# EAGLE board Zylox V2_0 (EAGLE 7.3.0), part 1 of 2
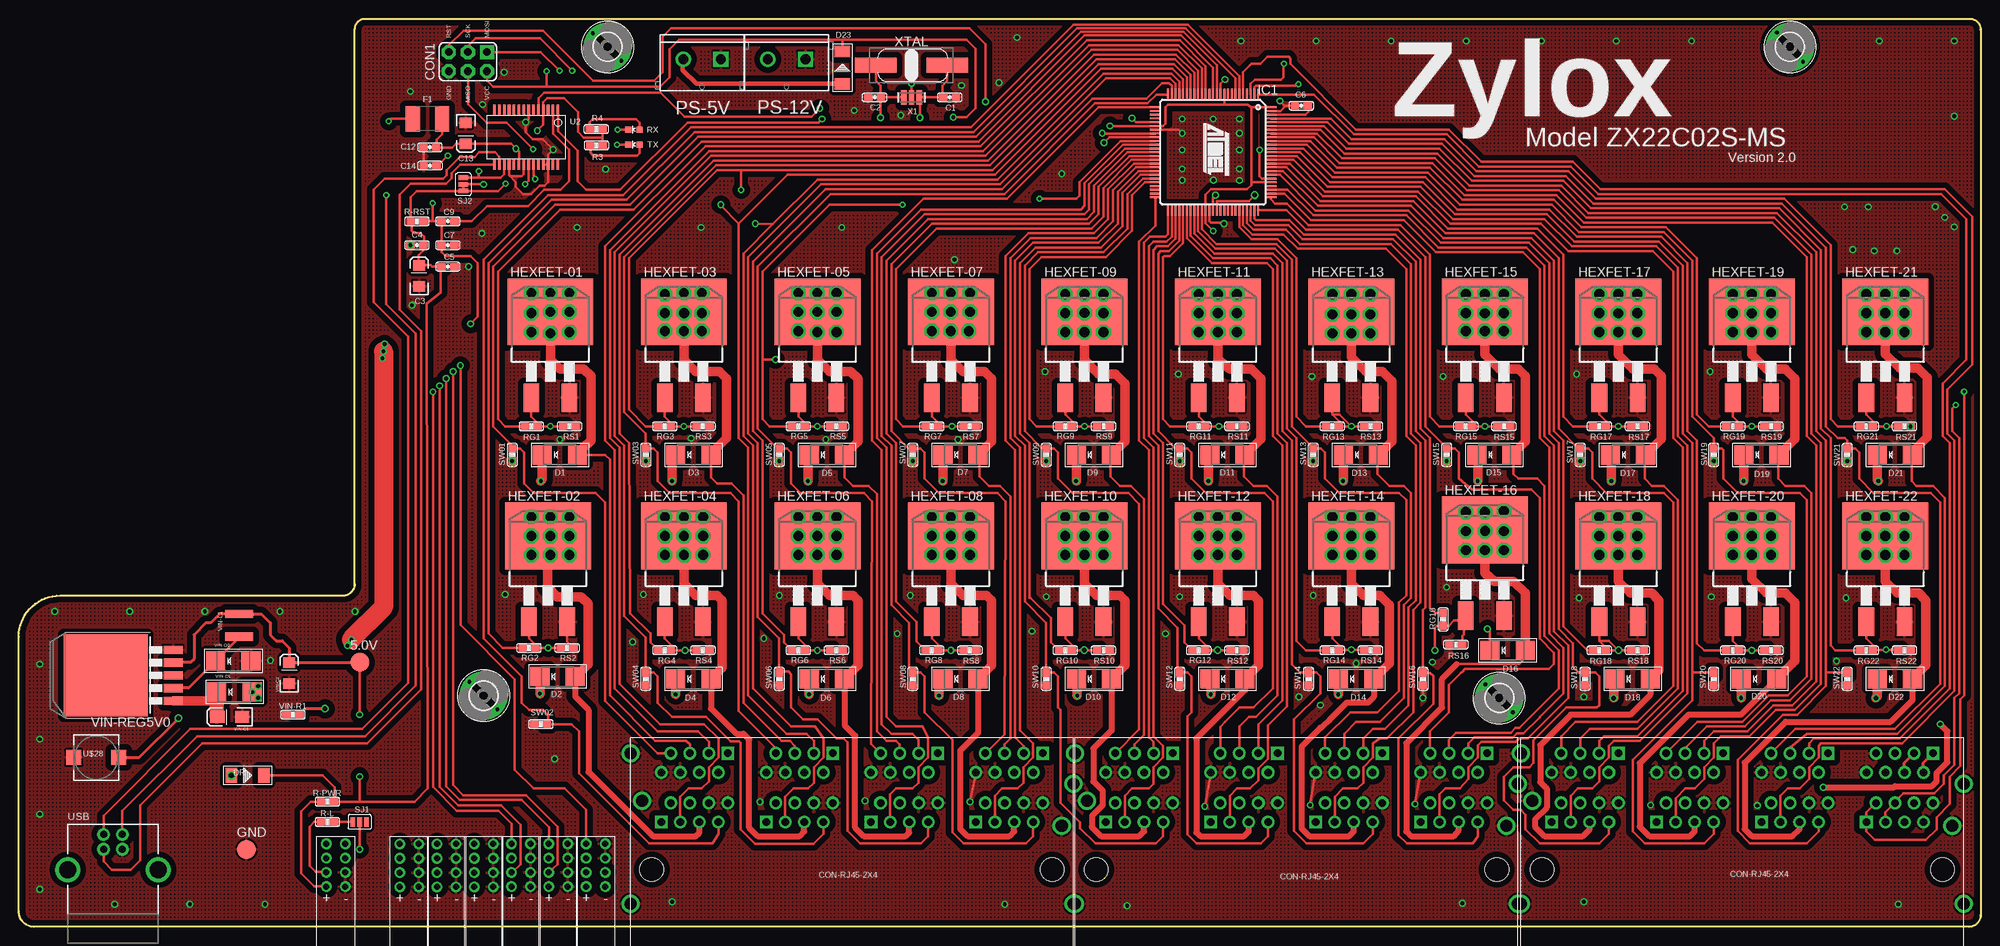
[diagram p0: board, top side]
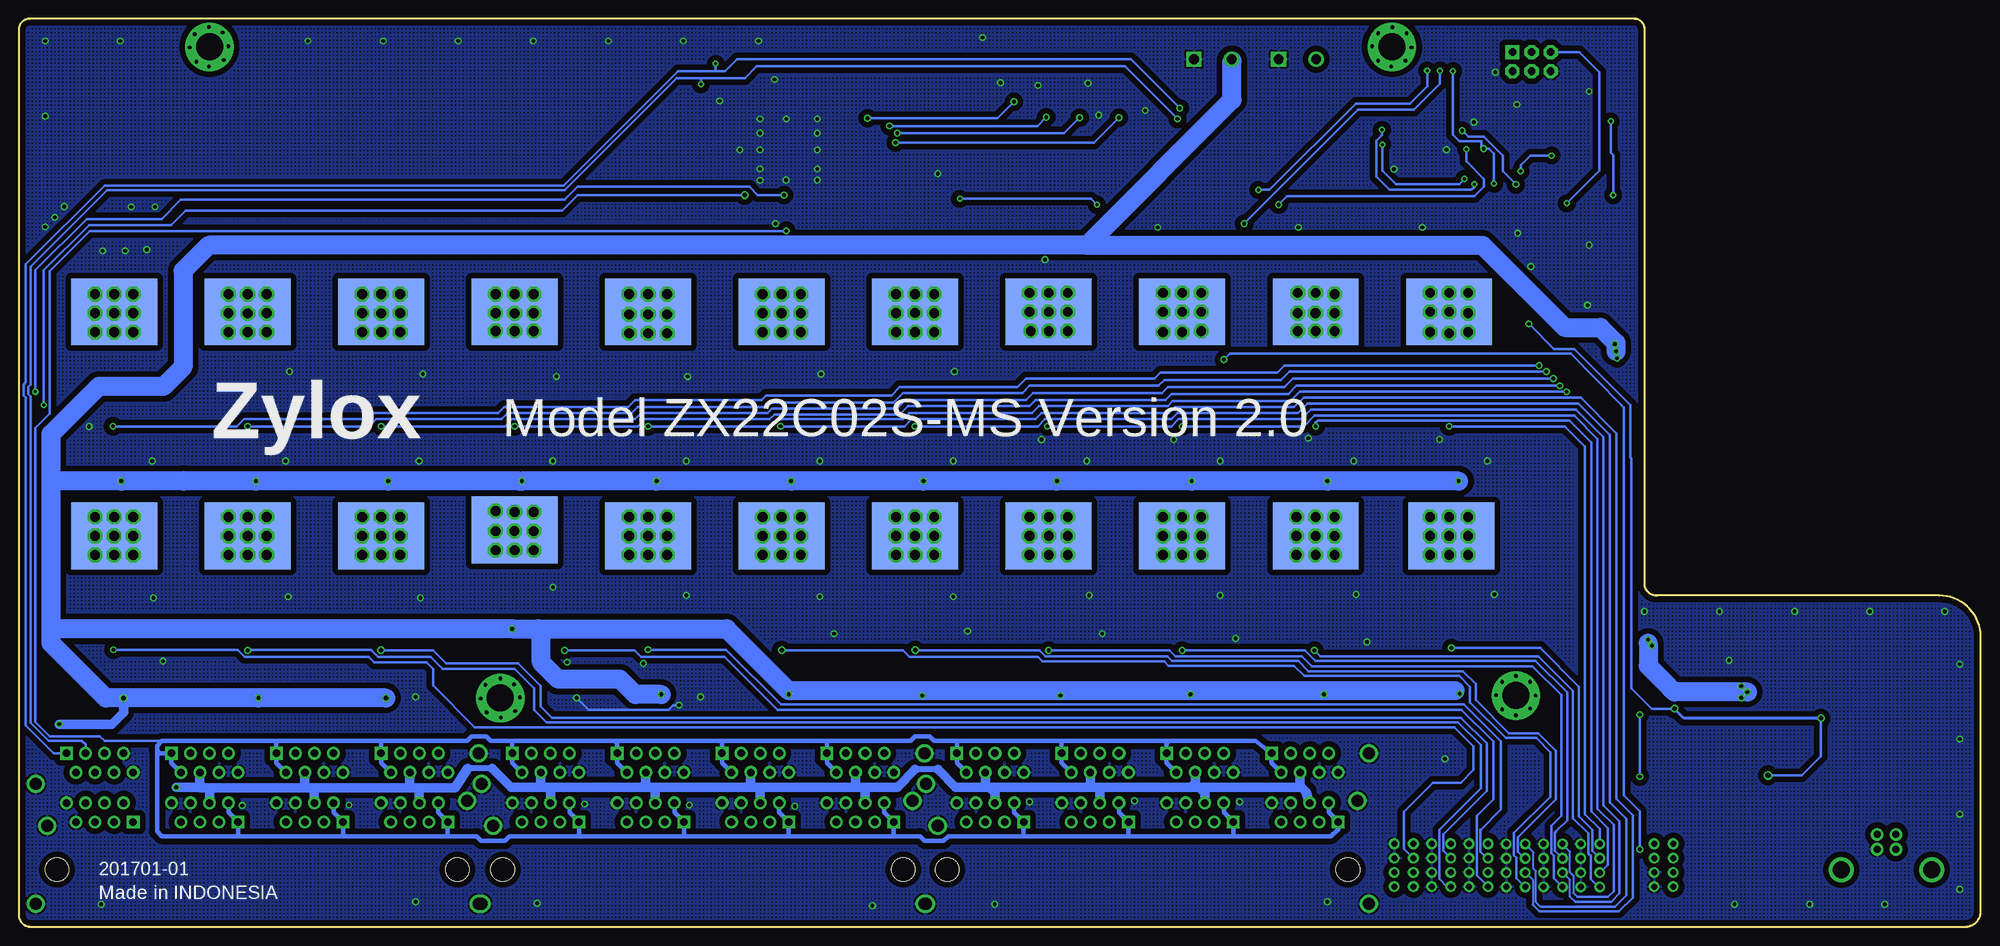
[diagram p1: board, bottom side, seen from below]

Size 261.3 x 120.97 mm. Coordinates in mm from the lower left corner, seen from the top.
Outline: 44.77,45.7 44.77,119.62 arc-90 46.11,120.97 259.84,120.97 arc-90 261.3,119.5 261.3,1.57 arc-90 259.73,0 2.03,0 arc-90 0,2.03 0,38.62 arc-90 5.51,44.13 43.2,44.13 arc90 44.77,45.7
Copper layers (1*16): Top 0.035mm / dielectric 1.5mm / Bottom 0.035mm
Design rules "DFRobot_Eagle_Rule_v0.4": minimum track width 6mil, minimum drill 12mil, track to track 6mil, track to pad 6mil, pad to pad 6mil, via to via 6mil, smd to smd 0mil, copper to edge 10mil, drill to drill 10mil, minimum pad ring 12mil, minimum via ring 8mil, stop-mask expansion 2mil, vias tented up to drill 25mil, thermal gap 10mil
Net classes: 1 power: width 0.254 mm; 3 usbvcc: width 0.508 mm, drill 0.61 mm, clearance 0.254 mm

## Footprints (pad centres in the part's own frame; a part is rotated, then mirrored left to right if it is on the bottom)
B2,54 = smd 2.54 x 2.54: TP 0,0
C0603 = smd 1.1 x 1: 1 -0.85,0; 2 0.85,0
EIA3126 = smd 1.4 x 1.6: A 1.4,0; C -1.4,0
CON-ICSP = drill 1.016 pad 1.88 square: 1 -2.54,-1.27 | drill 1.016 pad 1.88 octagon: 2 -2.54,1.27; 3 0,-1.27; 4 0,1.27; 5 2.54,-1.27; 6 2.54,1.27
SMADIODE = smd 2.54 x 2.54: A 2.349,0; C -2.349,0
D2010 = smd 1.524 x 2.032: + -2.159,0; - 2.159,0
L1812 = smd 1.9 x 3.4: 1 -1.95,0; 2 1.95,0
HOLES-3M6-PAD = drill 3.6 pad 6.452: B3,6 0,0
D2PAK = smd 2.083 x 3.81: 1 -2.54,-8.89; 3 2.54,-8.89 | smd 11.43 x 8.89: 2 0,2.54 | smd 11.43 x 8.89 bottom: 4 0,2.54
TQFP100 = smd 1.473 x 0.254: 1 -7.696,6; 2 -7.696,5.5; 3 -7.696,5; 4 -7.696,4.5; 5 -7.696,4; 6 -7.696,3.5; 7 -7.696,3; 8 -7.696,2.5; 9 -7.696,2; 10 -7.696,1.5; 11 -7.696,1; 12 -7.696,0.5; 13 -7.696,0; 14 -7.696,-0.5; 15 -7.696,-1; 16 -7.696,-1.5; 17 -7.696,-2; 18 -7.696,-2.5; 19 -7.696,-3; 20 -7.696,-3.5; 21 -7.696,-4; 22 -7.696,-4.5; 23 -7.696,-5; 24 -7.696,-5.5; 25 -7.696,-6; 51 7.696,-6; 52 7.696,-5.5; 53 7.696,-5; 54 7.696,-4.5; 55 7.696,-4; 56 7.696,-3.5; 57 7.696,-3; 58 7.696,-2.5; 59 7.696,-2; 60 7.696,-1.5; 61 7.696,-1; 62 7.696,-0.5; 63 7.696,0; 64 7.696,0.5; 65 7.696,1; 66 7.696,1.5; 67 7.696,2; 68 7.696,2.5; 69 7.696,3; 70 7.696,3.5; 71 7.696,4; 72 7.696,4.5; 73 7.696,5; 74 7.696,5.5; 75 7.696,6 | smd 0.254 x 1.473: 26 -6,-7.696; 27 -5.5,-7.696; 28 -5,-7.696; 29 -4.5,-7.696; 30 -4,-7.696; 31 -3.5,-7.696; 32 -3,-7.696; 33 -2.5,-7.696; 34 -2,-7.696; 35 -1.5,-7.696; 36 -1,-7.696; 37 -0.5,-7.696; 38 0,-7.696; 39 0.5,-7.696; 40 1,-7.696; 41 1.5,-7.696; 42 2,-7.696; 43 2.5,-7.696; 44 3,-7.696; 45 3.5,-7.696; 46 4,-7.696; 47 4.5,-7.696; 48 5,-7.696; 49 5.5,-7.696; 50 6,-7.696; 76 6,7.696; 77 5.5,7.696; 78 5,7.696; 79 4.5,7.696; 80 4,7.696; 81 3.5,7.696; 82 3,7.696; 83 2.5,7.696; 84 2,7.696; 85 1.5,7.696; 86 1,7.696; 87 0.5,7.696; 88 0,7.696; 89 -0.5,7.696; 90 -1,7.696; 91 -1.5,7.696; 92 -2,7.696; 93 -2.5,7.696; 94 -3,7.696; 95 -3.5,7.696; 96 -4,7.696; 97 -4.5,7.696; 98 -5,7.696; 99 -5.5,7.696; 100 -6,7.696
LED3MM-1X4 = drill 0.8 pad 1.15: A1 -1.27,4.065; A2 -1.27,2.16; A3 -1.27,0.255; A4 -1.27,-1.65; C1 1.27,4.065; C2 1.27,2.16; C3 1.27,0.255; C4 1.27,-1.65
SCREWTERMINAL-5MM-2 = drill 1.3 pad 2.032 square: 1 0,0 | drill 1.3 pad 2.032: 2 5,0
R0603 = smd 1.1 x 1: 1 -0.85,0; 2 0.85,0
RJ45-2X4 = drill 1 pad 1.676 square: A1 -16.51,0; B1 -7.62,9.14; C1 -2.54,0; D1 6.35,9.14; E1 11.43,0; F1 20.32,9.14; G1 25.4,0; H1 34.29,9.14 | drill 1 pad 1.676: A2 -15.24,2.54; A3 -13.97,0; A4 -12.7,2.54; A5 -11.43,0; A6 -10.16,2.54; A7 -8.89,0; A8 -7.62,2.54; B2 -8.89,6.6; B3 -10.16,9.14; B4 -11.43,6.6; B5 -12.7,9.14; B6 -13.97,6.6; B7 -15.24,9.14; B8 -16.51,6.6; C2 -1.27,2.54; C3 0,0; C4 1.27,2.54; C5 2.54,0; C6 3.81,2.54; C7 5.08,0; C8 6.35,2.54; D2 5.08,6.6; D3 3.81,9.14; D4 2.54,6.6; D5 1.27,9.14; D6 0,6.6; D7 -1.27,9.14; D8 -2.54,6.6; E2 12.7,2.54; E3 13.97,0; E4 15.24,2.54; E5 16.51,0; E6 17.78,2.54; E7 19.05,0; E8 20.32,2.54; F2 19.05,6.6; F3 17.78,9.14; F4 16.51,6.6; F5 15.24,9.14; F6 13.97,6.6; F7 12.7,9.14; F8 11.43,6.6; G2 26.67,2.54; G3 27.94,0; G4 29.21,2.54; G5 30.48,0; G6 31.75,2.54; G7 33.02,0; G8 34.29,2.54; H2 33.02,6.6; H3 31.75,9.14; H4 30.48,6.6; H5 29.21,9.14; H6 27.94,6.6; H7 26.67,9.14; H8 25.4,6.6 | drill 1.6: GND1 -20.605,9.14; GND2 -19.05,2.8; GND3 -20.605,-10.92; GND4 38.385,5.08; GND5 36.83,-0.5; GND6 38.385,-10.92 | hole 3.2: -17.78,-6.35; 35.56,-6.35
LED-0603 = smd 0.8 x 0.8: A 0,-0.75; C 0,0.75
SJ_3 = smd 0.635 x 1.27: 1 -0.889,0; 2 0,0; 3 0.889,0
SSOP28DB = smd 0.348 x 1.397: 1 -4.225,-3.656; 2 -3.575,-3.656; 3 -2.925,-3.656; 4 -2.275,-3.656; 5 -1.625,-3.656; 6 -0.975,-3.656; 7 -0.325,-3.656; 8 0.325,-3.656; 9 0.975,-3.656; 10 1.625,-3.656; 11 2.275,-3.656; 12 2.925,-3.656; 13 3.575,-3.656; 14 4.225,-3.656; 15 4.225,3.656; 16 3.575,3.656; 17 2.925,3.656; 18 2.275,3.656; 19 1.625,3.656; 20 0.975,3.656; 21 0.325,3.656; 22 -0.325,3.656; 23 -0.975,3.656; 24 -1.625,3.656; 25 -2.275,3.656; 26 -2.925,3.656; 27 -3.575,3.656; 28 -4.225,3.656
PUSHBUTTON-SMD-SJ = smd 2 x 2: P$1 3,0; P$2 -3,0
USB-B-PTH = drill 0.914 pad 1.676: D+ 3.81,1.25; D- 5.791,1.25; GND 3.81,-1.25; VBUS 5.791,-1.25 | drill 2.286: S1 1.092,-6.02; S2 1.092,6.02
EIA3216-KIT = smd 1.9 x 1.6: A 1.65,0; C -1.65,0
RWPA4018 = smd 1.1 x 3.7: 1 -1.5,0; 2 1.5,0
TO-293-5 = smd 10.922 x 11.176: 6 0,3.048 | smd 1.092 x 2.54: FB 1.702,-5.944; GND 0,-5.944; ONOFF 3.404,-5.944; OUT -1.702,-5.944; VIN -3.404,-5.944
CSTCE* = smd 0.7 x 1.905: 1 -1.041,0; 2 0,0; 3 1.041,0
SMD-CRYSTAL = smd 5.5 x 2: 1 -4.75,0; 2 4.75,0

## Placement (x,y rotation side)
5.0V  PTR1B2,54  [B2,54]  45.4,35.24 0 top
C1  22p  [C0603]  123.98,110.49 180 top
C2  22p  [C0603]  113.98,110.49 0 top
C3  10uF  [EIA3126]  53.29,86.74 90 top
C4  100n  [C0603]  53.02,90.81 0 top
C5  100n  [C0603]  57.15,87.95 180 top
C6  100n  [C0603]  170.81,109.38 180 top
C7  100n  [C0603]  57.15,90.81 180 top
C9  100n  [C0603]  57.15,93.98 0 top
C12  0.1uF  [C0603]  54.75,103.85 180 top
C13  10uF  [EIA3126]  59.55,105.72 270 top
C14  0.1uF  [C0603]  54.77,101.4 180 top
CON1  CON-ICSP  [CON-ICSP]  59.82,115.25 180 top
D1  [SMADIODE]  72.07,62.87 0 top
D2  [SMADIODE]  71.75,33.34 0 top
D3  [SMADIODE]  89.85,62.87 0 top
D4  [SMADIODE]  89.85,33.02 0 top
D5  [SMADIODE]  107.63,62.87 0 top
D6  [SMADIODE]  107.63,33.02 0 top
D7  [SMADIODE]  125.41,62.87 0 top
D8  [SMADIODE]  125.41,33.02 0 top
D9  [SMADIODE]  143.19,62.87 0 top
D10  [SMADIODE]  143.19,33.02 0 top
D11  [SMADIODE]  160.97,62.87 0 top
D12  [SMADIODE]  160.97,33.02 0 top
D13  [SMADIODE]  178.75,62.87 0 top
D14  [SMADIODE]  178.12,33.02 0 top
D15  [SMADIODE]  196.53,62.87 0 top
D16  [SMADIODE]  198.28,36.83 0 top
D17  [SMADIODE]  214.31,62.87 0 top
D18  [SMADIODE]  214.95,33.02 0 top
D19  [SMADIODE]  232.09,62.87 0 top
D20  [SMADIODE]  231.78,33.02 0 top
D21  [SMADIODE]  249.87,62.87 0 top
D22  [SMADIODE]  249.87,33.02 0 top
D23  M7  [D2010]  109.7,114.46 90 top
DR  M7  [D2010]  30.48,20.16 0 top
F1  MF-MSMF050-2 500mA  [L1812]  54.45,107.63 180 top
GND  PTR1B2,54  [B2,54]  30.32,10.32 0 top
H1  HOLES-PAD-3M6-PAD  [HOLES-3M6-PAD]  78.42,117.22 0 top
H2  HOLES-PAD-3M6-PAD  [HOLES-3M6-PAD]  61.91,30.8 0 top
H3  HOLES-PAD-3M6-PAD  [HOLES-3M6-PAD]  197.17,30.48 0 top
H4  HOLES-PAD-3M6-PAD  [HOLES-3M6-PAD]  235.9,117.22 0 top
HEXFET-01  IRLZ44NS  [D2PAK]  70.8,79.38 0 top
HEXFET-02  IRLZ44NS  [D2PAK]  70.48,49.53 0 top
HEXFET-03  IRLZ44NS  [D2PAK]  88.58,79.38 0 top
HEXFET-04  IRLZ44NS  [D2PAK]  88.58,49.53 0 top
HEXFET-05  IRLZ44NS  [D2PAK]  106.36,79.38 0 top
HEXFET-06  IRLZ44NS  [D2PAK]  106.36,49.53 0 top
HEXFET-07  IRLZ44NS  [D2PAK]  124.14,79.38 0 top
HEXFET-08  IRLZ44NS  [D2PAK]  124.14,49.53 0 top
HEXFET-09  IRLZ44NS  [D2PAK]  141.92,79.38 0 top
HEXFET-10  IRLZ44NS  [D2PAK]  141.92,49.53 0 top
HEXFET-11  IRLZ44NS  [D2PAK]  159.7,79.38 0 top
HEXFET-12  IRLZ44NS  [D2PAK]  159.7,49.53 0 top
HEXFET-13  IRLZ44NS  [D2PAK]  177.48,79.38 0 top
HEXFET-14  IRLZ44NS  [D2PAK]  177.48,49.53 0 top
HEXFET-15  IRLZ44NS  [D2PAK]  195.26,79.38 0 top
HEXFET-16  IRLZ44NS  [D2PAK]  195.26,50.32 0 top
HEXFET-17  IRLZ44NS  [D2PAK]  213.04,79.38 0 top
HEXFET-18  IRLZ44NS  [D2PAK]  213.04,49.53 0 top
HEXFET-19  IRLZ44NS  [D2PAK]  230.82,79.38 0 top
HEXFET-20  IRLZ44NS  [D2PAK]  230.82,49.53 0 top
HEXFET-21  IRLZ44NS  [D2PAK]  248.6,79.38 0 top
HEXFET-22  IRLZ44NS  [D2PAK]  248.6,49.53 0 top
IC1  ATMEGA2560-16AU  [TQFP100]  159.07,103.19 270 top
LD1  LED-1X4  [LED3MM-1X4]  52.01,6.97 0 top
LD2  LED-1X4  [LED3MM-1X4]  56.97,6.97 0 top
LD3  LED-1X4  [LED3MM-1X4]  61.93,6.97 0 top
LD4  LED-1X4  [LED3MM-1X4]  66.89,6.99 0 top
LD5  LED-1X4  [LED3MM-1X4]  71.85,6.99 0 top
LD6  LED-1X4  [LED3MM-1X4]  76.84,6.99 0 top
PS-5V  M025MM  [SCREWTERMINAL-5MM-2]  93.5,115.57 180 top
PS-12V  M025MM  [SCREWTERMINAL-5MM-2]  104.78,115.57 180 top
PWR  LED-1X4  [LED3MM-1X4]  42.23,6.99 0 top
R3  330  [R0603]  76.95,104.1 0 top
R4  330  [R0603]  76.9,106.26 0 top
R-L  1K  [R0603]  41.12,13.97 0 top
R-PWR  1K  [R0603]  41.12,16.67 0 top
R-RST  10K  [R0603]  53.03,93.98 180 top
RG1  330  [R0603]  68.26,66.67 0 top
RG2  330  [R0603]  67.94,37.15 0 top
RG3  330  [R0603]  86.04,66.67 0 top
RG4  330  [R0603]  86.04,36.83 0 top
RG5  330  [R0603]  103.82,66.67 0 top
RG6  330  [R0603]  103.82,36.83 0 top
RG7  330  [R0603]  121.6,66.67 0 top
RG8  330  [R0603]  121.6,36.83 0 top
RG9  330  [R0603]  139.38,66.67 0 top
RG10  330  [R0603]  139.38,36.83 0 top
RG11  330  [R0603]  157.16,66.67 0 top
RG12  330  [R0603]  157.16,36.83 0 top
RG13  330  [R0603]  174.94,66.67 0 top
RG14  330  [R0603]  174.94,36.83 0 top
RG15  330  [R0603]  192.72,66.67 0 top
RG16  330  [R0603]  189.71,40.96 270 top
RG17  330  [R0603]  210.5,66.67 0 top
RG18  330  [R0603]  210.5,36.83 0 top
RG19  330  [R0603]  228.28,66.67 0 top
RG20  330  [R0603]  228.28,36.83 0 top
RG21  330  [R0603]  246.06,66.67 0 top
RG22  330  [R0603]  246.06,36.83 0 top
RJ1  CON-RJ45-2X4  [RJ45-2X4]  102.08,13.97 0 top
RJ2  CON-RJ45-2X4  [RJ45-2X4]  161.29,13.97 0 top
RJ3  CON-RJ45-2X4  [RJ45-2X4]  220.66,13.97 0 top
RS1  10K  [R0603]  73.34,66.67 180 top
RS2  10K  [R0603]  73.03,37.15 180 top
RS3  10K  [R0603]  91.12,66.67 180 top
RS4  10K  [R0603]  91.12,36.83 180 top
RS5  10K  [R0603]  108.9,66.67 180 top
RS6  10K  [R0603]  108.9,36.83 180 top
RS7  10K  [R0603]  126.68,66.67 180 top
RS8  10K  [R0603]  126.68,36.83 180 top
RS9  10K  [R0603]  144.46,66.67 180 top
RS10  10K  [R0603]  144.46,36.83 180 top
RS11  10K  [R0603]  162.24,66.67 180 top
RS12  10K  [R0603]  162.24,36.83 180 top
RS13  10K  [R0603]  180.02,66.67 180 top
RS14  10K  [R0603]  180.02,36.83 180 top
RS15  10K  [R0603]  197.8,66.67 180 top
RS16  10K  [R0603]  191.4,37.59 0 top
RS17  10K  [R0603]  215.58,66.67 180 top
RS18  10K  [R0603]  215.58,36.83 180 top
RS19  10K  [R0603]  233.36,66.67 180 top
RS20  10K  [R0603]  233.36,36.83 180 top
RS21  10K  [R0603]  251.14,66.67 180 top
RS22  10K  [R0603]  251.14,36.83 180 top
RX  Green  [LED-0603]  81.91,106.18 90 top
SJ1  [SJ_3]  45.4,13.97 180 top
SJ2  [SJ_3]  59.21,98.91 90 top
SW01  1K  [R0603]  65.72,62.87 90 top
SW02  1K  [R0603]  69.53,26.99 180 top
SW03  1K  [R0603]  83.5,62.87 90 top
SW04  1K  [R0603]  83.5,33.02 270 top
SW05  1K  [R0603]  101.28,62.87 90 top
SW06  1K  [R0603]  101.28,33.02 270 top
SW07  1K  [R0603]  119.06,62.87 90 top
SW08  1K  [R0603]  119.06,33.02 270 top
SW09  1K  [R0603]  136.84,62.87 90 top
SW10  1K  [R0603]  136.84,33.02 270 top
SW11  1K  [R0603]  154.62,62.87 90 top
SW12  1K  [R0603]  154.62,33.02 270 top
SW13  1K  [R0603]  172.4,62.87 90 top
SW14  1K  [R0603]  171.77,33.02 270 top
SW15  1K  [R0603]  190.18,62.87 90 top
SW16  1K  [R0603]  187.01,33.02 270 top
SW17  1K  [R0603]  207.96,62.87 90 top
SW18  1K  [R0603]  208.6,33.02 270 top
SW19  1K  [R0603]  225.74,62.87 90 top
SW20  1K  [R0603]  225.74,33.02 270 top
SW21  1K  [R0603]  243.52,62.87 90 top
SW22  1K  [R0603]  243.52,33.02 270 top
TX  Red  [LED-0603]  81.91,104.21 90 top
U2  FT232R  [SSOP28DB]  67.58,105.2 180 top
U$6  LOGO-GCI-L  [GCI-L]  45.68,11.2 0 bottom
U$28  PUSHBUTTON-SMD-SJ  [PUSHBUTTON-SMD-SJ]  10.32,22.54 0 top
USB  [USB-B-PTH]  12.54,6.51 90 top
VIN-C1  100uF 50v  [EIA3216-KIT]  28.1,27.94 180 top
VIN-C2  100uF 10v  [EIA3126]  36.04,33.81 90 top
VIN-D1  [SMADIODE]  28.73,31.27 0 top
VIN-D2  [SMADIODE]  28.57,35.4 0 top
VIN-L1  330uH  [RWPA4018]  29.37,40.16 270 top
VIN-R1  [R0603]  36.51,28.26 0 top
VIN-REG5V0  V_REG_5P-TO293-5  [TO-293-5]  14.61,33.5 90 top
X1  16M  [CSTCE*]  118.9,110.49 180 top
XTAL  16MHz  [SMD-CRYSTAL]  118.9,114.78 0 top

## Library data of the parts
5.0V GND = testpad
C1-C7 C9 C12-C14 CON1 H1-H4 HEXFET-01-HEXFET-09 HEXFET-10-HEXFET-22 IC1 LD1-LD6 PWR R3 R4 R-L R-PWR R-RST RG1-RG22 RJ1-RJ3 RS1-RS22 SW01-SW09 SW10-SW22 U$6 U$28 USB VIN-C2 VIN-R1 VIN-REG5V0 X1 XTAL = geraicerdas
D1-D22 VIN-D1 VIN-D2 = adafruit
D23 DR = Discrete
F1 = rcl
PS-5V PS-12V = SparkFun-Connectors
RX = SparkFun-LED; PROD_ID: DIO-00821
SJ1 SJ2 U2 = SparkFun
TX = SparkFun-LED; PROD_ID: DIO-00819
VIN-C1 = SparkFun-Passives
VIN-L1 = microduino

## Nets
3.3V_FTDI [power]: C14.1 SJ2.3 U2.17
+5V: 5.0V.TP C3.A C4.2 C5.2 C12.1 C13.A CON1.2 D23.- DR.- F1.1 IC1.10 IC1.31 IC1.61 IC1.80 IC1.100 R-PWR.2 R-RST.2 RJ1.A1 RJ1.A2 RJ1.B1 RJ1.B2 RJ1.C1 RJ1.C2 RJ1.D1 RJ1.D2 RJ1.E1 RJ1.E2 RJ1.F1 RJ1.F2 RJ1.G1 RJ1.G2 RJ1.H1 RJ1.H2 RJ2.A1 RJ2.A2 RJ2.B1 RJ2.B2 RJ2.C1 RJ2.C2 RJ2.D1 RJ2.D2 RJ2.E1 RJ2.E2 RJ2.F1 RJ2.F2 RJ2.G1 RJ2.G2 RJ2.H1 RJ2.H2 RJ3.A1 RJ3.A2 RJ3.B1 RJ3.B2 RJ3.C1 RJ3.C2 RJ3.D1 RJ3.D2 RJ3.E1 RJ3.E2 RJ3.F1 RJ3.F2 SJ2.1 U2.20 VIN-C2.A VIN-L1.1 VIN-REG5V0.FB
+L01: HEXFET-01.1 LD1.A1 RG1.2 RS1.2
+L02: HEXFET-02.1 LD1.A2 RG2.2 RS2.2
+L03: HEXFET-03.1 LD1.A3 RG3.2 RS3.2
+L04: HEXFET-04.1 LD1.A4 RG4.2 RS4.2
+L05: HEXFET-05.1 LD2.A1 RG5.2 RS5.2
+L06: HEXFET-06.1 LD2.A2 RG6.2 RS6.2
+L07: HEXFET-07.1 LD2.A3 RG7.2 RS7.2
+L08: HEXFET-08.1 LD2.A4 RG8.2 RS8.2
+L09: HEXFET-09.1 LD3.A1 RG9.2 RS9.2
+L10: HEXFET-10.1 LD3.A2 RG10.2 RS10.2
+L11: HEXFET-11.1 LD3.A3 RG11.2 RS11.2
+L12: HEXFET-12.1 LD3.A4 RG12.2 RS12.2
+L13: HEXFET-13.1 LD4.A1 RG13.2 RS13.2
+L14: HEXFET-14.1 LD4.A2 RG14.2 RS14.2
+L15: HEXFET-15.1 LD4.A3 RG15.2 RS15.2
+L16: HEXFET-16.1 LD4.A4 RG16.2 RS16.2
+L17: HEXFET-17.1 LD5.A1 RG17.2 RS17.2
+L18: HEXFET-18.1 LD5.A2 RG18.2 RS18.2
+L19: HEXFET-19.1 LD5.A3 RG19.2 RS19.2
+L20: HEXFET-20.1 LD5.A4 RG20.2 RS20.2
+L21: HEXFET-21.1 LD6.A1 RG21.2 RS21.2
+L22: HEXFET-22.1 LD6.A2 RG22.2 RS22.2
AREF: C6.1 IC1.98
DTR: C9.2 U2.2
GND: C1.1 C2.1 C3.C C4.1 C5.1 C6.2 C7.1 C12.2 C13.C C14.2 CON1.6 GND.TP HEXFET-01.3 HEXFET-02.3 HEXFET-03.3 HEXFET-04.3 HEXFET-05.3 HEXFET-06.3 HEXFET-07.3 HEXFET-08.3 HEXFET-09.3 HEXFET-10.3 HEXFET-11.3 HEXFET-12.3 HEXFET-13.3 HEXFET-14.3 HEXFET-15.3 HEXFET-16.3 HEXFET-17.3 HEXFET-18.3 HEXFET-19.3 HEXFET-20.3 HEXFET-21.3 HEXFET-22.3 IC1.11 IC1.32 IC1.62 IC1.81 IC1.99 LD1.C1 LD1.C2 LD1.C3 LD1.C4 LD2.C1 LD2.C2 LD2.C3 LD2.C4 LD3.C1 LD3.C2 LD3.C3 LD3.C4 LD4.C1 LD4.C2 LD4.C3 LD4.C4 LD5.C1 LD5.C2 LD5.C3 LD5.C4 LD6.C1 LD6.C2 PS-5V.1 PS-12V.1 PWR.C3 PWR.C4 RJ1.A6 RJ1.A8 RJ1.B6 RJ1.B8 RJ1.C6 RJ1.C8 RJ1.D6 RJ1.D8 RJ1.E6 RJ1.E8 RJ1.F6 RJ1.F8 RJ1.G6 RJ1.G8 RJ1.GND1 RJ1.GND2 RJ1.GND3 RJ1.GND4 RJ1.GND5 RJ1.GND6 RJ1.H6 RJ1.H8 RJ2.A6 RJ2.A8 RJ2.B6 RJ2.B8 RJ2.C6 RJ2.C8 RJ2.D6 RJ2.D8 RJ2.E6 RJ2.E8 RJ2.F6 RJ2.F8 RJ2.G6 RJ2.G8 RJ2.GND1 RJ2.GND2 RJ2.GND3 RJ2.GND4 RJ2.GND5 RJ2.GND6 RJ2.H6 RJ2.H8 RJ3.A6 RJ3.A8 RJ3.B6 RJ3.B8 RJ3.C6 RJ3.C8 RJ3.D6 RJ3.D8 RJ3.E6 RJ3.E8 RJ3.F6 RJ3.F8 RJ3.G7 RJ3.G8 RJ3.GND1 RJ3.GND2 RJ3.GND3 RJ3.GND4 RJ3.GND5 RJ3.GND6 RJ3.H7 RJ3.H8 RS1.1 RS2.1 RS3.1 RS4.1 RS5.1 RS6.1 RS7.1 RS8.1 RS9.1 RS10.1 RS11.1 RS12.1 RS13.1 RS14.1 RS15.1 RS16.1 RS17.1 RS18.1 RS19.1 RS20.1 RS21.1 RS22.1 SW01.1 SW02.2 SW03.1 SW04.2 SW05.1 SW06.2 SW07.1 SW08.2 SW09.1 SW10.2 SW11.1 SW12.2 SW13.1 SW14.2 SW15.1 SW16.2 SW17.1 SW18.2 SW19.1 SW20.2 SW21.1 SW22.2 U2.7 U2.18 U2.21 U2.25 U2.26 U$28.P$2 USB.GND VIN-C1.C VIN-C2.C VIN-D2.A VIN-R1.1 VIN-REG5V0.GND VIN-REG5V0.ONOFF X1.2
N$1: C1.2 IC1.33 X1.1 XTAL.2
N$2: C2.2 IC1.34 X1.3 XTAL.1
N$4: D23.+ PS-5V.2
N$6: R3.1 TX.A
N$7: R4.1 RX.A
N$8: F1.2 USB.VBUS
N$9: PWR.A4 R-PWR.1
N$10: PWR.A3 R-L.1
N$11: R-L.2 SJ1.3
N$93: VIN-D2.C VIN-L1.2 VIN-REG5V0.OUT
N$94: VIN-C1.A VIN-D1.C VIN-REG5V0.VIN
PIN-IR01: IC1.15 RJ1.B3
PIN-IR02: IC1.16 RJ1.A3
PIN-IR03: CON1.4 IC1.21 RJ1.D3
PIN-IR04: CON1.1 IC1.22 RJ1.C3
PIN-IR05: IC1.26 RJ1.F3
PIN-IR06: IC1.36 RJ1.E3
PIN-IR07: IC1.41 RJ1.H3
PIN-IR08: IC1.42 RJ1.G3
PIN-IR09: IC1.50 RJ2.B3
PIN-IR10: IC1.51 RJ2.A3
PIN-IR11: IC1.56 RJ2.D3
PIN-IR12: IC1.57 RJ2.C3
PIN-IR13: IC1.71 RJ2.F3
PIN-IR14: IC1.72 RJ2.E3
PIN-IR15: IC1.77 RJ2.H3
PIN-IR16: IC1.78 RJ2.G3
PIN-IR17: IC1.86 RJ3.B3
PIN-IR18: IC1.87 RJ3.A3
PIN-IR19: IC1.92 RJ3.D3
PIN-IR20: IC1.93 RJ3.C3
PIN-IR21: IC1.1 RJ3.F3
PIN-IR22: IC1.5 RJ3.E3
PIN-S01: IC1.13 RG1.1
PIN-S02: IC1.7 RG2.1
PIN-S03: CON1.3 IC1.20 RG3.1
PIN-S04: IC1.18 RG4.1
PIN-S05: IC1.35 RG5.1 SJ1.2
PIN-S06: IC1.24 RG6.1
PIN-S07: IC1.40 RG7.1
PIN-S08: IC1.38 RG8.1
PIN-S09: IC1.46 RG9.1
PIN-S10: IC1.44 RG10.1
PIN-S11: IC1.55 RG11.1
PIN-S12: IC1.53 RG12.1
PIN-S13: IC1.70 RG13.1
PIN-S14: IC1.59 RG14.1
PIN-S15: IC1.76 RG15.1
PIN-S16: IC1.74 RG16.1
PIN-S17: IC1.85 RG17.1
PIN-S18: IC1.83 RG18.1
PIN-S19: IC1.91 RG19.1
PIN-S20: IC1.89 RG20.1
PIN-S21: IC1.97 RG21.1
PIN-S22: IC1.95 RG22.1
PIN-SW01: IC1.12 RJ1.B7 SW01.2
PIN-SW02: IC1.6 RJ1.A7 SW02.1
PIN-SW03: IC1.19 RJ1.D7 SW03.2
PIN-SW04: IC1.17 RJ1.C7 SW04.1
PIN-SW05: IC1.25 RJ1.F7 SW05.2
PIN-SW06: IC1.23 RJ1.E7 SW06.1
PIN-SW07: IC1.39 RJ1.H7 SW07.2
PIN-SW08: IC1.37 RJ1.G7 SW08.1
PIN-SW09: IC1.45 RJ2.B7 SW09.2
PIN-SW10: IC1.43 RJ2.A7 SW10.1
PIN-SW11: IC1.54 RJ2.D7 SW11.2
PIN-SW12: IC1.52 RJ2.C7 SW12.1
PIN-SW13: IC1.60 RJ2.F7 SW13.2
PIN-SW14: IC1.58 RJ2.E7 SW14.1
PIN-SW15: IC1.75 RJ2.H7 SW15.2
PIN-SW16: IC1.73 RJ2.G7 SW16.1
PIN-SW17: IC1.84 RJ3.B7 SW17.2
PIN-SW18: IC1.82 RJ3.A7 SW18.1
PIN-SW19: IC1.90 RJ3.D7 SW19.2
PIN-SW20: IC1.88 RJ3.C7 SW20.1
PIN-SW21: IC1.96 RJ3.F7 SW21.2
PIN-SW22: IC1.94 RJ3.E7 SW22.1
RESET: C7.2 C9.1 CON1.5 DR.+ IC1.30 R-RST.1 U$28.P$1 VIN-R1.2
RX_MASTER_SLAVE: IC1.63 RJ3.G1 RJ3.G2
RXD: IC1.3 RJ3.H1 RJ3.H2 U2.5
RXLED: RX.C U2.22
SOLENOID-01: D1.A HEXFET-01.2 HEXFET-01.4 RJ1.B5
SOLENOID-02: D2.A HEXFET-02.2 HEXFET-02.4 RJ1.A5
SOLENOID-03: D3.A HEXFET-03.2 HEXFET-03.4 RJ1.D5
SOLENOID-04: D4.A HEXFET-04.2 HEXFET-04.4 RJ1.C5
SOLENOID-05: D5.A HEXFET-05.2 HEXFET-05.4 RJ1.F5
SOLENOID-06: D6.A HEXFET-06.2 HEXFET-06.4 RJ1.E5
SOLENOID-07: D7.A HEXFET-07.2 HEXFET-07.4 RJ1.H5
SOLENOID-08: D8.A HEXFET-08.2 HEXFET-08.4 RJ1.G5
SOLENOID-09: D9.A HEXFET-09.2 HEXFET-09.4 RJ2.B5
SOLENOID-10: D10.A HEXFET-10.2 HEXFET-10.4 RJ2.A5
SOLENOID-11: D11.A HEXFET-11.2 HEXFET-11.4 RJ2.D5
SOLENOID-12: D12.A HEXFET-12.2 HEXFET-12.4 RJ2.C5
SOLENOID-13: D13.A HEXFET-13.2 HEXFET-13.4 RJ2.F5
SOLENOID-14: D14.A HEXFET-14.2 HEXFET-14.4 RJ2.E5
SOLENOID-15: D15.A HEXFET-15.2 HEXFET-15.4 RJ2.H5
SOLENOID-16: D16.A HEXFET-16.2 HEXFET-16.4 RJ2.G5
SOLENOID-17: D17.A HEXFET-17.2 HEXFET-17.4 RJ3.B5
SOLENOID-18: D18.A HEXFET-18.2 HEXFET-18.4 RJ3.A5
SOLENOID-19: D19.A HEXFET-19.2 HEXFET-19.4 RJ3.D5
SOLENOID-20: D20.A HEXFET-20.2 HEXFET-20.4 RJ3.C5
SOLENOID-21: D21.A HEXFET-21.2 HEXFET-21.4 RJ3.F5
SOLENOID-22: D22.A HEXFET-22.2 HEXFET-22.4 RJ3.E5
TX_MASTER_SLAVE: IC1.64 RJ3.G3 RJ3.G4
TXD: IC1.2 RJ3.H3 RJ3.H4 U2.1
TXLED: TX.C U2.23
USB_D+: U2.15 USB.D+
USB_D-: U2.16 USB.D-
VCCIO: R3.2 R4.2 SJ2.2 U2.4
VDD: D1.C D2.C D3.C D4.C D5.C D6.C D7.C D8.C D9.C D10.C D11.C D12.C D13.C D14.C D15.C D16.C D17.C D18.C D19.C D20.C D21.C D22.C PS-12V.2 RJ1.A4 RJ1.B4 RJ1.C4 RJ1.D4 RJ1.E4 RJ1.F4 RJ1.G4 RJ1.H4 RJ2.A4 RJ2.B4 RJ2.C4 RJ2.D4 RJ2.E4 RJ2.F4 RJ2.G4 RJ2.H4 RJ3.A4 RJ3.B4 RJ3.C4 RJ3.D4 RJ3.E4 RJ3.F4 VIN-D1.A

## Tracks (layer width: path | path; a pad name or v marks a point on that pad's centre or on a via)
3.3V_FTDI  (via drill 0.41)
  Top 0.305: 59.23,99.78 SJ2.3 61.21,99.8 | 64.66,101.3 U2.17 64.64,101.53 64.64,100.27 64.18,99.8 61.21,99.8 | C14.1 55.81,101.4 v57.15,102.74 | v61.28,100.65 61.28,99.86 61.21,99.8
  Bottom 0.305: v57.15,102.74 60.01,102.74 61.28,101.47 v61.28,100.65
+5V  (via drill 0.41, 0.5)
  Top 0.305: 164.15,99.22 164.15,109.22 | 164.15,109.22 163.67,109.54 160.5,109.54 | 160.5,109.54 153.03,109.54 152.72,109.22 152.72,107 152.4,106.68 151.08,106.68 IC1.31 v145.34,106.69 v145.34,106.68 | IC1.10 160.57,109.61 160.5,109.54 | IC1.100 165.54,109.19 164.15,109.22 | IC1.80 165.55,99.19 164.15,99.22 | 109.7,118.19 126.21,118.19 127.4,117 127.4,109.06 126.21,107.87 v124.46,107.87 | 109.7,118.19 87.95,118.19 86.68,116.92 86.68,113.19 85.41,111.92 70.29,111.92 | v159.07,92.71 158.07,93.71 IC1.61 158.07,97.52 158.81,98.26 163.57,98.26 164.15,98.83 164.15,99.22 | 45.4,16.67 52.7,16.67 54.45,18.41 54.29,83.03 56.2,84.45 56.2,87.84 C5.2 55.06,87.94 54.86,88.14 C3.A 53.29,89.49 53.87,90.08 C4.2 53.97,90.91 53.97,91.92 53.5,92.39 52.7,92.39 52.33,92.77 52.33,93.83 R-RST.2 52.2,94 52.2,97.22 53,98.02 SJ2.1 63.86,98.02 v64.83,99 | 70.29,111.92 63.15,111.92 62.36,112.71 CON1.2 | v70.29,113.98 70.29,111.92 | D23.- 109.7,118.19 | 66.63,101.56 U2.20 66.61,103.25 v66.2,103.66 65.54,104.32 C13.A 58.22,104.32 57.72,103.82 55.63,103.82 C12.1 55.63,103.87 55.63,104.84 56.36,105.57 56.36,107.59 F1.1 | 45.4,16.67 R-PWR.2 42.07,16.77 42.07,18.57 40.48,20.16 DR.- | 45.4,16.67 v45.4,20 | v45.4,28.26 5.0V.TP
  Top 0.406: 5.0V.TP 36.06,35.24 VIN-C2.A 36.04,37.15 35.08,38.1 34.29,38.1 33.5,38.89 33.5,40.48 32.31,41.66 VIN-L1.1 26.74,41.66 25.56,40.48 24.92,40.48 23.34,38.89 23.34,35.72 22.86,35.24 20.59,35.24 VIN-REG5V0.FB
  Bottom 0.305: v145.34,106.69 125.64,106.69 v124.46,107.87 | v159.07,92.71 159.11,92.67 251.86,92.67 257.18,87.35 257.18,68.36 259.1,66.44 259.1,27.3 257.19,25.4 250.51,25.4 249.87,24.77 241.62,24.77 | v64.83,99 64.83,103 65.5,103.66 v66.2,103.66 66.48,103.95 66.48,104.65 69.41,104.65 70.29,105.54 v70.29,113.98 | v45.4,20 v45.4,28.26
  Bottom 0.61: 242.89,23.5 242.89,24.13 242.25,24.77 241.62,24.77 227.01,24.77 | 242.89,23.5 242.89,12.7 242.25,12.06 232.09,12.06 | 232.09,12.06 218.12,12.06 | 218.12,12.06 204.15,12.06 | 204.15,12.06 200.34,12.06 199.71,11.43 196.53,11.43 195.9,12.06 186.85,12.06 | 186.85,12.06 172.72,12.06 | 172.72,12.06 158.75,12.06 | 158.75,12.06 144.78,12.06 | 144.78,12.06 141.29,12.06 140.65,11.43 138.11,11.43 137.48,12.06 127.48,12.06 | 127.48,12.06 113.35,12.06 | 113.35,12.06 99.7,12.06 | 99.7,12.06 86.52,12.06 85.57,13.02 RJ1.A1 86.84,15.24 RJ1.A2 | 204.15,12.06 RJ3.A1 205.42,15.24 RJ3.A2 | 218.12,12.06 RJ3.C1 219.39,15.24 RJ3.C2 | 232.09,12.06 RJ3.E1 233.36,15.24 RJ3.E2 | 227.01,24.77 213.04,24.77 | 213.04,24.77 201.61,24.77 200.98,25.4 199.07,25.4 198.44,24.77 195.58,24.77 | 195.58,24.77 181.93,24.77 | 181.93,24.77 167.8,24.77 | 167.8,24.77 153.67,24.77 | 153.67,24.77 142.56,24.77 141.92,25.4 140.02,25.4 139.38,24.77 136.37,24.77 | 136.37,24.77 122.4,24.77 | 122.4,24.77 108.11,24.77 | 108.11,24.77 96.59,24.77 RJ1.B1 94.46,21.84 RJ1.B2 | 213.04,24.77 RJ3.B1 213.04,21.84 RJ3.B2 | 227.01,24.77 RJ3.D1 227.01,21.84 RJ3.D2 | 242.89,23.5 242.5,23.11 RJ3.F1 240.98,21.84 RJ3.F2 | 195.58,24.77 RJ2.H1 195.58,21.84 RJ2.H2 | 186.85,12.06 186.69,12.22 RJ2.G1 187.96,15.24 RJ2.G2 | 181.93,24.77 181.61,24.45 RJ2.F1 181.61,21.84 RJ2.F2 | 172.72,12.06 RJ2.E1 173.99,15.24 RJ2.E2 | 167.8,24.77 167.64,24.61 RJ2.D1 167.64,21.84 RJ2.D2 | 158.75,12.06 RJ2.C1 160.02,15.24 RJ2.C2 | 153.67,24.77 RJ2.B1 153.67,21.84 RJ2.B2 | RJ2.A2 146.05,15.24 RJ2.A1 144.78,12.06 | 136.37,24.77 RJ1.H1 136.37,21.84 RJ1.H2 | 127.48,12.06 RJ1.G1 128.75,15.24 RJ1.G2
  Bottom 0.61: 122.4,24.77 RJ1.F1 122.4,21.84 RJ1.F2 | 113.35,12.06 113.51,12.22 RJ1.E1 114.78,15.24 RJ1.E2 | 108.11,24.77 108.43,24.45 RJ1.D1 108.43,21.84 RJ1.D2 | 99.7,12.06 99.54,12.22 RJ1.C1 100.81,15.24 RJ1.C2
+L01  (via drill 0.5)
  Top 0.305: HEXFET-01.1 68.26,67.94 69.26,66.94 RG1.2 v70.8,66.67 RS1.2
  Bottom 0.305: v70.8,66.67 55.4,66.67 52.7,63.98 52.7,14.99 50.74,13.02 LD1.A1
+L02  (via drill 0.5)
  Top 0.305: HEXFET-02.1 67.95,38.42 68.95,37.42 RG2.2 v70.49,37.15 RS2.2
  Bottom 0.305: v70.49,37.15 58.66,37.15 53.5,31.99 53.5,14.68 51.75,12.94 51.75,10.14 LD1.A2
+L03  (via drill 0.5)
  Top 0.305: HEXFET-03.1 86.04,67.94 87.04,66.94 RG3.2 v88.58,66.67 RS3.2
  Bottom 0.305: v88.58,66.67 88.58,67.15 88.27,67.47 54.77,67.47 51.88,64.52 51.88,15.37 49.65,13.14 49.65,8.26 50.68,7.22 LD1.A3
+L04  (via drill 0.5)
  Top 0.305: v88.74,36.83 RS4.2 | HEXFET-04.1 86.04,38.42 87.04,37.42 RG4.2 v88.74,36.83 | v88.74,36.83 90.17,36.83
  Bottom 0.305: v88.74,36.83 87.95,36.04 58.9,36.04 54.29,31.43 54.29,14.45 52.27,12.42 52.27,9.74 51.95,9.43 51.95,6.35 50.92,5.32 LD1.A4
+L05  (via drill 0.5)
  Top 0.305: HEXFET-05.1 103.82,67.94 104.82,66.94 RG5.2 v106.36,66.67 RS5.2
  Bottom 0.254: 53.74,3.97 54.27,4.5 54.27,6.89 54.29,6.89 54.69,7.28 54.69,10.02 LD2.A1
  Bottom 0.305: v106.36,66.67 90.17,66.67 88.74,68.1 54.13,68.1 51.09,64.99 51.05,64.96 51.05,15.75 48.9,13.59 48.9,4.76 49.69,3.97 53.74,3.97
+L06  (via drill 0.5)
  Top 0.305: RS6.2 v106.36,36.83 RG6.2 104.82,37.42 103.82,38.42 HEXFET-06.1
  Bottom 0.305: v106.36,36.83 90.01,36.83 88.58,35.4 59.29,35.4 55.09,31.19 55.09,14.21 56.59,12.7 56.59,12.68 56.65,12.62 56.67,12.62 56.71,12.58 56.71,10.14 LD2.A2
+L07  (via drill 0.5)
  Top 0.305: HEXFET-07.1 121.6,67.94 122.6,66.94 RG7.2 v124.3,66.67 RS7.2
  Bottom 0.254: 53.99,3.33 54.69,4.03 54.71,4.03 54.71,6.23 LD2.A3
  Bottom 0.305: v124.3,66.67 107.79,66.67 106.84,67.63 90.49,67.63 89.22,68.9 53.9,68.9 50.23,65.23 50.23,16.19 48.1,14.06 48.1,4.45 49.21,3.33 53.99,3.33
+L08  (via drill 0.5)
  Top 0.305: RS8.2 v124.14,36.83 RG8.2 122.6,37.42 121.6,38.42 HEXFET-08.1
  Bottom 0.305: v124.14,36.83 108.03,36.83 107.24,36.04 90.41,36.04 89.06,34.69 59.69,34.69 55.88,30.88 55.88,14.76 57.21,13.43 57.21,9.8 56.87,9.46 56.87,6.45 55.74,5.32 LD2.A4
+L09  (via drill 0.5)
  Top 0.305: HEXFET-09.1 139.38,68.26 140.38,67.26 RG9.2 v141.92,66.67 RS9.2
  Bottom 0.254: 58.58,2.7 58.64,2.7 59.23,3.29 59.23,7.42 59.55,7.74 59.55,9.92 LD3.A1
  Bottom 0.305: v141.92,66.67 125.57,66.67 124.62,67.63 107.79,67.63 107,68.42 90.96,68.42 89.69,69.69 53.58,69.69 49.4,65.52 49.4,16.57 47.23,14.4 47.23,4.21 48.74,2.7 58.58,2.7
+L10  (via drill 0.6)
  Top 0.305: RS10.2 v141.92,36.83 RG10.2 140.38,37.42 139.38,38.42 HEXFET-10.1
  Bottom 0.305: v141.92,36.83 125.33,36.83 124.54,36.04 108.35,36.04 107.71,35.4 90.88,35.4 89.53,34.05 68.98,34.05 67.27,32.34 67.27,30.2 62.85,25.78 58.92,25.78 56.59,23.45 56.59,16.99 61.67,11.93 61.67,10.02 60.76,9.12 LD3.A2
+L11  (via drill 0.5)
  Top 0.305: HEXFET-11.1 157.16,67.94 158.16,66.94 RG11.2 v159.86,66.67 RS11.2
  Bottom 0.254: 58.8,2.06 59.65,2.92 59.67,2.92 59.67,6.23 LD3.A3
  Bottom 0.305: v159.86,66.67 143.35,66.67 142.4,67.63 125.89,67.63 125.09,68.42 108.11,68.42 107.31,69.22 91.44,69.22 90.17,70.48 53.26,70.48 48.51,65.74 48.51,17.02 46.35,14.86 46.35,3.89 48.18,2.06 58.8,2.06
+L12  (via drill 0.6)
  Top 0.305: HEXFET-12.1 157.16,38.42 158.16,37.42 RG12.2 v159.7,36.83 RS12.2
  Bottom 0.305: v159.7,36.83 143.51,36.83 142.64,35.96 125.57,35.96 124.94,35.32 108.74,35.32 108.19,34.77 91.44,34.77 90.09,33.42 69.43,33.42 68,31.99 68,29.92 63.22,25.14 59.21,25.14 57.31,23.24 57.31,17.3 62.15,12.52 62.15,9.53 61.81,9.21 61.81,6.49 60.66,5.34 LD3.A4
+L13  (via drill 0.5)
  Top 0.305: 174.94,68.26 175.94,67.26 RG13.2 v177.48,66.67 | 174.94,68.26 HEXFET-13.1 | v177.48,66.67 RS13.2 | 174.94,68.26 175.9,68.26 v177.48,66.67 | v55.17,71.28 55.17,18.65 58.34,15.48 63.88,15.48 65.62,13.73 LD4.A1
  Bottom 0.305: v177.48,66.67 161.13,66.67 160.18,67.63 143.51,67.63 142.72,68.42 126.36,68.42 125.41,69.37 108.27,69.37 107.63,70.01 91.92,70.01 90.65,71.28 v55.17,71.28
+L14  (via drill 0.5)
  Top 0.305: HEXFET-14.1 174.94,38.42 175.94,37.42 RG14.2 175.87,36.91 v177.48,36.91 179.09,36.91 RS14.2
  Bottom 0.305: v177.48,36.91 167.08,36.91 159.78,29.61 68.82,29.61 63.9,24.69 63.9,15.64 66.6,12.94 66.66,12.94 66.66,10.02 65.78,9.14 LD4.A2
+L15  (via drill 0.5)
  Top 0.305: HEXFET-15.1 192.72,68.26 193.72,67.26 RG15.2 v195.26,66.67 RS15.2 | v56.04,72.07 56.04,18.65 58.5,16.19 64.21,16.19 66.83,13.57 66.83,8.35 65.72,7.24 LD4.A3
  Bottom 0.305: v195.26,66.67 178.91,66.67 177.96,67.63 161.29,67.63 160.66,68.26 143.99,68.26 142.88,69.37 126.68,69.37 125.89,70.17 108.58,70.17 107.79,70.96 92.23,70.96 91.12,72.07 v56.04,72.07
+L16  (via drill 0.5)
  Top 0.305: 192.56,40.8 192.45,40.37 192.45,38.94 192.25,38.73 RS16.2 | 192.56,40.8 HEXFET-16.1 | 192.56,40.8 191.13,40.8 190.44,40.11 RG16.2 188.86,40.11 188.59,39.85 v188.59,36.83
  Bottom 0.305: v188.59,36.83 179.31,36.83 178.44,35.96 167.32,35.96 160.26,28.89 69.14,28.89 64.93,24.69 64.93,17.01 67.13,14.8 67.13,6.88 65.62,5.38 LD4.A4
+L17  (via drill 0.5)
  Top 0.305: HEXFET-17.1 210.5,68.26 211.5,67.26 RG17.2 v213.04,66.67 RS17.2 | v56.91,73.03 56.91,18.73 58.74,16.91 66.99,16.91 70.64,13.26 LD5.A1
  Bottom 0.305: v213.04,66.67 196.53,66.67 195.58,67.63 179.23,67.63 178.44,68.42 161.61,68.42 160.97,69.06 144.3,69.06 143.19,70.17 127.16,70.17 126.21,71.12 109.06,71.12 108.27,71.91 92.71,71.91 91.6,73.03 v56.91,73.03
+L18  (via drill 0.6)
  Top 0.305: 210.5,38.1 211.5,37.1 RG18.2 v213.04,36.83 | 210.5,38.1 HEXFET-18.1 | v213.04,36.83 RS18.2 | 210.5,38.1 211.77,38.1 v213.04,36.83
  Bottom 0.305: v213.04,36.83 206.14,36.83 204.39,35.08 194.81,35.08 191.81,32.09 191.81,29.39 190.28,27.86 69.22,27.86 65.8,24.45 65.8,18.1 71.6,12.3 71.6,10.1 70.64,9.14 LD5.A2
+L19  (via drill 0.5)
  Top 0.305: v230.82,66.67 RS19.2 | HEXFET-19.1 228.28,67.94 229.13,67.09 RG19.2 v230.82,66.67 | v230.82,66.67 232.73,66.67 | v57.86,73.98 57.86,18.89 59.21,17.54 67.55,17.54 71.75,13.34 71.75,8.35 LD5.A3
  Bottom 0.305: v230.82,66.67 214.63,66.67 213.68,67.63 197.01,67.63 196.22,68.42 179.71,68.42 178.91,69.22 162.08,69.22 161.45,69.85 144.78,69.85 143.51,71.12 127.64,71.12 126.68,72.07 109.54,72.07 108.74,72.87 93.19,72.87 92.07,73.98 v57.86,73.98
+L20  (via drill 0.5)
  Top 0.305: HEXFET-20.1 228.28,38.1 229.13,37.25 RG20.2 v230.82,36.83 RS20.2
  Bottom 0.305: v230.82,36.83 230.82,36.91 214.39,36.91 213.44,35.96 206.45,35.96 204.85,34.35 195.28,34.35 192.66,31.73 192.66,28.91 190.98,27.23 69.61,27.23 66.6,24.21 66.6,18.41 72.11,12.9 72.11,6.37 71.08,5.33 LD5.A4
+L21  (via drill 0.5)
  Top 0.305: HEXFET-21.1 246.06,68.26 247.06,67.26 RG21.2 v248.76,66.67 RS21.2 | LD6.A1 75.56,15.56 72.71,18.41 68.56,18.41 66.04,20.93 66.04,32.98 58.82,40.2 v58.82,74.77
  Bottom 0.305: v248.76,66.67 232.25,66.67 231.3,67.63 214.95,67.63 214.15,68.42 197.48,68.42 196.69,69.22 180.18,69.22 179.23,70.17 162.4,70.17 161.77,70.8 145.1,70.8 143.99,71.91 128.27,71.91 127.16,73.03 110.01,73.03 109.22,73.82 93.66,73.82 92.71,74.77 v58.82,74.77
+L22  (via drill 0.5)
  Top 0.305: HEXFET-22.1 246.06,38.42 247.06,37.42 RG22.2 246.99,36.91 v248.68,36.91 250.21,36.91 RS22.2
  Bottom 0.305: v248.68,36.91 232.17,36.91 231.22,35.96 214.71,35.96 214,35.24 207.01,35.24 206.14,34.37 206.14,32.15 200.58,26.59 70.09,26.59 67.55,24.05 67.55,20.88 69.22,19.21 72.95,19.21 76.84,15.32 76.84,10.41 LD6.A2
AREF
  Top 0.305: IC1.98 171.37,108.19 171.77,108.58 171.77,109.28 C6.1
DTR
  Top 0.305: U2.2 71.15,105.67 73.29,103.53 73.29,99.33 72.14,98.17 69.98,98.17 67.82,96.01 62.36,96.01 60.33,93.98 C9.2
GND  (via drill 0.5)
  Top 0.305: IC1.62 158.57,94 158.75,93.82 160.34,93.82 v160.5,93.66 | IC1.32 154.48,106.19 v154.94,105.73 | IC1.11 160.07,112.28 v160.66,112.87 | IC1.99 168.06,108.69 168.75,109.38 | IC1.81 165.58,99.69 165.26,100.01 v165.26,103.5 | C14.2 53.92,103.83 C12.2 | RS2.1 73.02,38 HEXFET-02.3 | X1.2 v118.9,112.39 | C6.2 168.75,109.38 | 168.75,109.38 168.59,109.38 v167.96,110.01 | U2.7 67.9,107.59 v67.5,107.18 67.5,105.86 68.42,104.93 69.75,104.93 v71.15,103.53 70.5,102.88 U2.26 | U2.18 65.3,100.17 | 65.3,100.17 65.3,100.11 66.2,99.22 66.2,98.58 67.15,97.63 68.26,97.63 69.37,98.74 70.01,98.74 70.49,99.22 70.49,101.52 U2.26 | U2.25 U2.26 | U2.21 67.25,100.28 66.99,100.01 65.46,100.01 65.3,100.17 | RJ2.H8 v185.96,16.35 | RJ2.F8 v171.99,16.22 | RJ2.D8 v157.96,16.03 | RJ1.H8 v126.68,16.64 | SW16.2 v187.01,30.48
  Bottom 0.305: v160.5,93.66 160.5,93.5 | v187.01,30.48 185.42,28.89 174.78,28.89 174.15,29.53 v173.35,29.53
  other vias: 162.56,103.5 154.94,103.5 154.94,107.63 162.56,107.63 162.56,99.43 154.94,99.47 154.94,100.97 162.56,105.73 162.56,100.97 159.11,99.47 159.07,107.63 74.37,93.19 90.88,93.19 109.62,93.19 124.62,88.88 136.68,73.96 154.46,73.64 172.24,73.32 189.71,73.32 207.49,73.64 225.27,73.96 243.16,95.89 44.78,42 4.78,42 14.78,42 24.78,42 34.78,42 172.4,44.13 207.8,43.81 208.44,30.64 154.62,43.97 225.74,62.05 243.52,62.05 61.79,109.56 61.67,92.39 59.93,87.95 52.17,111.28 2.78,35 2.78,25 2.78,15 2.78,5 12.78,3 87,3.34 131.33,3.01 147.62,2.79 192.27,3.12 208.45,3.34 250.33,3.01 257.78,108 257.78,118 247.78,118 222.78,118 212.78,118 202.78,118 192.78,118 182.78,118 172.78,118 162.78,118 138.91,100.33 78.17,100.93 64.64,113.85 247.12,90.06 231.55,16.16 217.33,16.22 112.71,16.8 98.71,16.64 52.37,82.8 22.78,3 32.78,3 117.47,108.11 246.34,95.89 244.27,90.22 250.14,90.06 243.36,43.81 225.43,43.97 242.09,35.4 251.94,66.66 207.96,62.05 190.18,62.05 172.4,62.05 154.62,62.05 136.84,62.05 119.06,62.05 101.28,62.05 83.5,62.05 65.72,62.05 72.07,64.91 89.54,65.07 107.47,64.91 125.1,64.91 64.77,44.29 83.19,44.29 101.28,44.13 118.75,44.13 136.84,43.97 33.51,35.49 71.36,22.38 111.28,108.74 125.57,112.08 132.94,118.48 130.56,112.44 52.15,90.81 81.76,37.94 99.22,38.42 117,39.05 134.94,39.37 152.72,39.05 178.12,35.08 170.5,30.64 190.18,45.24 188.28,35.24 256.51,94.51 255.24,95.94 257.78,93.24
  pour Top (isolate 0.762, hatched): -2.06,121.92 261.94,121.92 261.94,-0.64 -2.06,-0.64
  pour Bottom (isolate 0.762, hatched): -0.63,123.19 261.94,123.19 261.94,-2.22 -0.63,-2.22
H1  (via drill 0.5)
  Bottom 0.406: v78.36,119.84 78.42,119.84 78.42,117.32 | 78.42,117.32 78.42,117.16 | v80.27,119.04 80.27,119 78.66,117.4 | 78.66,117.4 78.42,117.16 | v81.06,117.3 78.76,117.3 78.66,117.4 | v80.27,115.39 80.27,115.47 78.66,117.08 78.52,117.22 | v78.52,114.6 78.52,117.22 | 78.52,117.22 78.42,117.32 | v76.62,115.39 76.66,115.39 78.34,117.08 | 78.34,117.08 78.42,117.16 | v75.82,117.14 78.28,117.14 78.34,117.08 | v76.46,119.04 76.7,119.04 78.52,117.22
H2  (via drill 0.5)
  Bottom 0.406: v60.01,29.05 60.09,29.05 61.83,30.8 | v61.91,28.18 61.91,30.72 | 61.91,30.72 61.83,30.8 | v63.74,28.97 63.66,28.97 61.91,30.72 | v64.53,30.88 62.39,30.88 | 62.39,30.88 62.31,30.88 | 62.31,30.88 62.07,30.88 | 62.07,30.88 61.91,30.72 | v63.74,32.62 63.74,32.31 62.31,30.88 | v61.91,33.42 61.91,31.04 62.07,30.88 | v60.01,32.62 61.83,30.8 | v59.29,30.8 62.31,30.8 62.39,30.88
H3  (via drill 0.5)
  Bottom 0.406: v235.98,119.86 235.98,117.32 | v237.89,118.9 237.57,118.9 235.98,117.32 | v238.52,117.16 236.14,117.16 | 236.14,117.16 235.98,117.32 | v237.65,115.25 237.65,115.65 236.14,117.16 | v235.98,114.62 235.98,117.32 | v234,115.49 234.16,115.49 235.7,117.04 | 235.7,117.04 235.86,117.2 | 235.86,117.2 235.98,117.32 | v233.36,117.32 235.43,117.32 235.7,117.04 | v234.16,119.14 234.16,118.9 235.86,117.2
H4  (via drill 0.5)
  Bottom 0.406: v197.17,33.1 197.17,30.56 | v199.15,32.23 198.83,32.23 197.17,30.56 | v199.79,30.4 197.33,30.4 | 197.33,30.4 197.25,30.48 | v198.99,28.57 198.99,28.73 197.33,30.4 | v197.09,27.86 197.09,30.16 197.33,30.4 | v195.18,28.73 195.5,28.73 197.13,30.36 | 197.13,30.36 197.25,30.48 | v194.55,30.56 197.17,30.56 | 197.17,30.56 197.25,30.48 | v195.34,32.31 195.34,32.15 197.13,30.36
N$1  (via drill 0.5)
  Top 0.305: XTAL.2 123.65,112.7 123.03,112.08 123.03,110.59 C1.2 X1.1 120.02,110.4 v120.02,107.79 | IC1.33 144.34,105.69 v144.3,105.73
  Bottom 0.305: v144.3,105.73 122.08,105.73 v120.02,107.79
N$2  (via drill 0.5)
  Top 0.305: C2.2 X1.3 | XTAL.1 114.15,112.7 114.78,112.08 114.78,110.55 C2.2 | IC1.34 145.27,105.19 v144.54,104.46 | v114.78,107.79 114.78,110.43 C2.2
  Bottom 0.305: v144.54,104.46 118.11,104.46 v114.78,107.79
N$3
  Top 0.406: 59.21,98.9 59.21,98.11
N$4
  Top 0.61: D23.+ 90.27,112.3 88.42,114.14 88.42,115.49 PS-5V.2
N$6
  Top 0.305: R3.1 76.14,104.06 76.14,103.12 76.52,102.74 82.36,102.74 82.68,103.06 82.68,104.2 TX.A
N$7
  Top 0.305: R4.1 76.05,107.16 76.45,107.57 82.23,107.57 82.68,107.12 82.68,106.19 RX.A
N$8  (via drill 0.41)
  Top 0.305: USB.VBUS 13.79,15.42 23.77,25.4 46.1,25.4 52.83,32.13 52.83,79.06 48.96,82.93 v48.96,97.47 | F1.2 49.59,107.63 v49.28,107.31
  Bottom 0.305: v48.96,97.47 48.96,102.81 49.28,103.12 v49.28,107.31
N$9
  Top 0.305: R-PWR.1 38.89,16.67 37.62,15.4 37.62,7.14 39.37,5.4 40.89,5.4 PWR.A4
N$10
  Top 0.305: R-L.1 39.37,13.97 38.74,13.34 38.74,8.1 39.53,7.3 40.89,7.3 PWR.A3
N$11
  Top 0.305: SJ1.3 R-L.2
N$93
  Top 0.406: VIN-REG5V0.OUT 22.62,31.79 VIN-D2.C 29.37,38.54 VIN-L1.2
N$94
  Top 0.406: VIN-D1.C 25.2,30.09 | VIN-C1.A 26.38,28
  Top 1.27: 25.2,30.09 VIN-REG5V0.VIN
  Top 1.93: 26.38,28 VIN-D1.C
PIN-IR01
  Top 0.305: RJ1.B3 91.92,24.61 90.49,26.04 85.09,26.04 79.38,31.75 79.38,63.5 78.1,64.77 78.1,90.65 91.44,103.98 128.11,103.98 142.24,118.11 154.62,118.11 158.07,114.67 IC1.15
PIN-IR02
  Top 0.305: RJ1.A3 88.11,17.3 89.22,18.41 90.96,18.41 91.92,19.37 91.92,21.27 93.19,22.54 93.19,25.08 91.28,26.99 85.41,26.99 80.01,32.38 80.01,63.82 78.74,65.09 78.74,90.17 91.92,103.35 128.43,103.35 142.56,117.47 154.46,117.47 157.57,114.37 IC1.16
PIN-IR03  (via drill 0.41, 0.5)
  Top 0.305: RJ1.D3 105.89,24.77 104.93,25.72 102.24,25.72 97.16,30.8 97.16,63.82 95.88,65.09 95.88,93.66 | IC1.21 155.07,112.9 153.67,114.3 144.14,114.3 130.02,100.17 102.39,100.17 95.88,93.66 | CON1.4 59.82,109.6 62.29,107.12 64.96,107.12 v68.52,103.57 | v93.5,96.2 93.5,96.04 95.88,93.66
  Bottom 0.305: v68.52,103.57 68.52,101.98 66.17,99.63 66.17,98.61 67.47,97.31 92.39,97.31 v93.5,96.2
PIN-IR04  (via drill 0.41, 0.5)
  Top 0.254: v98.11,93.66 100.33,93.66 100.41,93.58
  Top 0.305: RJ1.C3 102.08,17.3 103.19,18.41 105.09,18.41 105.89,19.21 105.89,21.27 107.16,22.54 107.16,25.08 106.05,26.67 102.87,26.67 97.79,31.75 97.79,64.14 96.52,65.41 96.52,89.69 100.41,93.58 106.36,99.54 130.33,99.54 144.46,113.67 153.51,113.67 154.57,112.61 IC1.22 | CON1.1 69.53,116.52 v72.01,114.05
  Bottom 0.254: 98.09,93.68 v98.11,93.66
  Bottom 0.305: v72.01,114.05 72.01,112.33 75.5,108.84 82.93,108.84 v98.11,93.66
PIN-IR05
  Top 0.305: RJ1.F3 119.86,24.92 119.06,25.72 116.2,25.72 114.94,26.99 114.94,63.5 113.66,64.77 113.66,90.17 120.49,97 131.6,97 143.8,109.19 IC1.26
PIN-IR06
  Top 0.305: RJ1.E3 116.05,17.62 116.84,18.41 119.06,18.41 119.86,19.21 119.86,21.27 121.13,22.54 121.13,25.24 120.33,26.67 116.84,26.67 115.57,27.94 115.57,63.82 114.3,65.09 114.3,89.69 120.17,95.57 141.45,95.57 141.92,96.04 141.92,99.06 147.05,104.19 IC1.36
PIN-IR07
  Top 0.305: RJ1.H3 133.89,24.06 132.72,25.24 132.72,63.5 131.44,64.77 131.44,89.38 134.46,92.39 143.19,92.39 145.1,94.3 145.1,98.27 148.52,101.69 IC1.41
PIN-IR08
  Top 0.305: RJ1.G3 130.02,17.46 130.97,18.41 133.03,18.41 133.83,19.21 133.83,21.27 135.1,22.54 135.1,24.45 133.35,26.19 133.35,63.82 132.08,65.09 132.08,89.06 134.78,91.76 143.51,91.76 145.73,93.98 145.73,98.11 148.81,101.19 IC1.42
PIN-IR09
  Top 0.305: RJ2.B3 151.13,24.61 150.5,25.24 150.5,63.5 149.22,64.77 149.22,91.28 151.37,93.42 IC1.50
PIN-IR10
  Top 0.305: RJ2.A3 147.32,17.46 148.27,18.41 150.5,18.41 151.13,19.05 151.13,21.27 152.4,22.54 152.4,24.13 151.13,25.4 151.13,63.82 149.86,65.09 149.86,91.12 150.65,91.92 152.72,91.92 153.07,92.27 IC1.51
PIN-IR11
  Top 0.305: RJ2.D3 165.1,26.99 168.28,30.16 168.28,64.14 167,65.41 167,87.63 166.21,88.42 158.91,88.42 155.57,91.77 IC1.56
PIN-IR12
  Top 0.305: RJ2.C3 161.29,17.46 162.24,18.41 163.99,18.41 165.1,19.53 165.1,21.11 166.37,22.38 166.37,26.83 168.91,29.37 168.91,64.45 167.64,65.72 167.64,88.11 166.69,89.06 159.07,89.06 156.07,92.06 IC1.57
PIN-IR13
  Top 0.305: 179.39,23.81 RJ2.F3 179.07,25.08 180.34,26.35 181.93,26.35 185.1,29.53 185.1,42.55 186.06,43.5 186.06,64.14 184.78,65.41 184.78,87.63 182.09,90.33 170.34,90.33 168.43,92.23 164.31,92.23 163.07,93.47 IC1.71
PIN-IR14
  Top 0.305: RJ2.E3 175.26,17.3 176.37,18.41 178.28,18.41 179.07,19.21 179.07,21.27 180.34,22.54 180.34,24.45 181.29,25.08 182.25,25.08 185.74,28.57 185.74,42.23 186.69,43.18 186.69,64.45 185.42,65.72 185.42,88.27 182.72,90.96 170.66,90.96 168.75,92.87 164.47,92.87 163.57,93.77 IC1.72
PIN-IR15
  Top 0.305: RJ2.H3 193.04,24.43 193.85,25.24 199.01,25.24 199.55,25.78 200.42,25.78 202.56,27.92 202.56,27.94 205.74,31.11 205.74,37.15 203.84,39.05 203.84,63.82 202.56,65.09 202.56,87.63 200.34,89.85 188.75,89.85 184.47,94.14 172.09,94.14 168.54,97.69 IC1.77
PIN-IR16
  Top 0.305: RJ2.G3 189.23,17.62 190.02,18.41 191.93,18.41 193.04,19.68 193.04,21.27 194.31,22.54 194.31,24.15 194.81,24.65 199.37,24.65 199.81,25.08 200.98,25.08 206.38,30.48 206.38,37.47 204.47,39.37 204.47,64.14 203.2,65.41 203.2,88.11 200.82,90.49 189.07,90.49 184.78,94.77 172.4,94.77 168.99,98.19 IC1.78
PIN-IR17
  Top 0.305: RJ3.B3 210.5,24.77 211.14,25.4 215.58,25.4 221.62,31.43 221.62,63.82 220.34,65.09 220.34,87.31 217.65,90.01 206.38,90.01 202.72,93.66 190.66,93.66 186.37,97.95 173.99,97.95 169.75,102.19 IC1.86
PIN-IR18
  Top 0.305: RJ3.A3 206.69,17.46 207.65,18.41 209.55,18.41 210.5,19.37 210.5,21.27 211.77,22.54 211.77,24.13 212.41,24.77 215.9,24.77 222.25,31.11 222.25,64.14 220.98,65.41 220.98,87.79 218.12,90.65 206.85,90.65 203.2,94.3 190.98,94.3 186.69,98.58 174.31,98.58 170.2,102.69 IC1.87
PIN-IR19
  Top 0.305: RJ3.D3 224.47,24.77 225.74,26.04 230.19,26.04 233.68,29.53 236.22,29.53 239.4,32.7 239.4,64.14 238.13,65.41 238.13,89.22 233.52,93.82 208.44,93.82 204.79,97.47 192.56,97.47 188.28,101.76 175.9,101.76 172.47,105.19 IC1.92
PIN-IR20
  Top 0.305: RJ3.C3 220.66,17.14 221.93,18.41 223.2,18.41 224.47,19.68 224.47,21.27 225.74,22.54 225.74,24.45 226.69,25.4 230.5,25.4 234,28.89 236.54,28.89 240.03,32.38 240.03,64.45 238.76,65.72 238.76,89.53 233.84,94.46 208.76,94.46 205.1,98.11 192.88,98.11 188.59,102.39 176.21,102.39 172.92,105.69 IC1.93
PIN-IR21
  Top 0.305: RJ3.F3 238.44,24.45 239.08,25.08 250.51,25.08 257.18,31.75 257.18,64.45 256.22,65.41 256.22,72.39 259.4,75.56 259.4,94.3 256.06,97.63 210.34,97.63 206.69,101.28 194.47,101.28 190.18,105.57 177.8,105.57 172.5,110.87 IC1.1
PIN-IR22
  Top 0.305: RJ3.E3 234.63,17.46 235.59,18.41 237.17,18.41 238.44,19.68 238.44,21.27 239.71,22.54 239.71,24.13 240.03,24.45 250.82,24.45 257.81,31.43 257.81,64.77 256.86,65.72 256.86,71.6 260.19,74.93 260.19,94.61 256.54,98.27 210.66,98.27 207.01,101.92 194.79,101.92 190.5,106.2 178.12,106.2 169.36,114.96 169.36,115.65 169.13,115.88 166.31,115.88 165.38,114.96 164.16,114.96 163.99,114.78 163.07,113.86 IC1.5
PIN-S01
  Top 0.305: RG1.1 64.77,66.67 63.82,67.63 63.82,87.31 72.07,95.57 81.92,95.57 90.96,104.62 127.79,104.62 141.92,118.75 154.78,118.75 159.07,114.46 IC1.13
PIN-S02
  Top 0.305: RG2.1 64.45,37.15 62.55,39.05 62.55,88.42 70.96,96.84 80.96,96.84 90.01,105.89 127.16,105.89 140.97,119.7 155.42,119.7 162.07,113.05 IC1.7
PIN-S03  (via drill 0.41)
  Top 0.305: RG3.1 83.5,66.67 81.28,68.9 81.28,89.06 93.03,100.81 96.14,100.81 | IC1.20 155.57,113.2 153.83,114.94 143.83,114.94 129.7,100.81 96.14,100.81 | CON1.3 59.82,117.35 60.83,118.36 69.41,118.36 v73.72,114.05 | v96.2,98.17 96.2,100.74 96.14,100.81
  Bottom 0.305: v73.72,114.05 73.72,111.95 76.01,109.67 83.25,109.67 94.74,98.17 v96.2,98.17
PIN-S04
  Top 0.305: IC1.18 156.57,113.78 154.15,116.2 143.19,116.2 129.06,102.08 92.55,102.08 80.01,89.53 80.01,65.72 81.28,64.45 81.43,42.07 81.43,41.77 84.14,39.05 84.14,37.88 RG4.1
PIN-S05  (via drill 0.41, 0.5)
  Top 0.305: RG5.1 100.01,66.67 99.06,67.63 99.06,75.56 | 99.06,75.56 99.06,87.31 107.95,96.2 v117.71,96.2 | SJ1.2 v45.4,10.32 | v100.81,75.56 99.06,75.56 | IC1.35 146.76,104.69 141.29,99.22 141.29,97.39 140.89,97 v135.97,97
  Bottom 0.305: v100.81,75.56 100.01,76.36 54.61,76.36 47.89,69.53 47.56,69.19 47.56,17.53 45.4,15.37 v45.4,10.32 | v135.97,97 118.51,97 v117.71,96.2
PIN-S06
  Top 0.305: IC1.24 153.57,112.02 153.19,112.39 152.24,112.39 150.18,110.33 143.03,110.33 130.97,98.27 107.47,98.27 97.79,88.58 97.79,66.04 99.06,64.77 99.06,41.75 101.92,38.89 101.92,37.88 RG6.1
PIN-S07
  Top 0.305: RG7.1 117.79,66.67 116.84,67.63 116.84,87.63 122.24,93.03 142.88,93.03 144.46,94.61 144.46,98.42 148.22,102.19 IC1.40
PIN-S08
  Top 0.305: IC1.38 147.64,103.19 143.19,98.74 143.19,95.25 142.24,94.3 121.13,94.3 115.57,88.74 115.57,65.72 116.84,64.45 116.84,43.34 119.54,40.64 119.54,38.04 RG8.1
PIN-S09
  Top 0.305: RG9.1 135.57,66.67 134.62,67.63 134.62,87.63 136.21,89.22 144.78,89.22 148.27,92.71 148.27,97.47 149.99,99.19 IC1.46
PIN-S10
  Top 0.305: IC1.44 149.4,100.19 147,97.79 147,93.34 144.14,90.49 135.41,90.49 133.35,88.42 133.35,65.72 134.62,64.45 134.62,43.81 134.78,43.81 137.48,41.12 137.48,37.88 RG10.1
PIN-S11
  Top 0.305: RG11.1 153.35,66.67 152.4,67.63 152.4,89.22 152.56,89.38 153.35,89.38 155.07,91.09 IC1.55
PIN-S12
  Top 0.305: IC1.53 154.07,91.68 153.03,90.65 151.61,90.65 151.13,90.17 151.13,65.72 152.4,64.45 152.4,43.02 155.26,40.16 155.26,37.88 RG12.1
PIN-S13
  Top 0.305: RG13.1 171.45,66.67 170.18,67.94 170.18,89.06 167.64,91.6 164.15,91.6 162.57,93.18 IC1.70
PIN-S14
  Top 0.305: RG14.1 171.45,36.83 170.18,38.1 170.18,65.09 168.91,66.36 168.91,88.74 167.32,90.33 159.39,90.33 157.07,92.65 IC1.59
PIN-S15
  Top 0.305: RG15.1 189.23,66.67 187.96,67.94 187.96,89.53 183.99,93.5 171.77,93.5 168.91,96.36 167.32,96.36 166.76,96.92 IC1.76
PIN-S16
  Top 0.305: IC1.74 164.57,94.35 164.78,94.14 169.23,94.14 171.13,92.23 183.36,92.23 186.69,88.9 186.69,66.36 187.96,65.09 187.96,42.55 188.7,41.81 RG16.1
PIN-S17
  Top 0.305: RG17.1 207.01,66.67 205.74,67.94 205.74,87.15 205.74,87.63 205.74,89.53 202.25,93.03 190.34,93.03 186.06,97.31 173.67,97.31 169.3,101.69 IC1.85
PIN-S18
  Top 0.305: RG18.1 208.91,36.83 205.74,40.01 205.74,64.77 204.47,66.04 204.47,88.74 201.45,91.76 189.71,91.76 185.42,96.04 173.04,96.04 168.39,100.69 IC1.83
PIN-S19
  Top 0.305: IC1.91 172.01,104.69 175.58,101.12 187.96,101.12 192.25,96.84 204.47,96.84 208.12,93.19 219.39,93.19 223.52,89.06 223.52,68.26 225.11,66.67 RG19.1
PIN-S20
  Top 0.305: IC1.89 171.11,103.69 174.94,99.85 187.32,99.85 191.61,95.57 203.84,95.57 207.49,91.92 218.76,91.92 222.25,88.42 222.25,66.04 223.52,64.77 223.52,37.78 224.47,36.83 RG20.1
PIN-S21
  Top 0.305: RG21.1 242.25,66.67 241.3,67.63 241.3,87.47 241.3,87.95 241.3,90.81 235.11,97 210.03,97 206.38,100.65 194.15,100.65 189.87,104.93 177.48,104.93 174.73,107.69 IC1.97
PIN-S22
  Top 0.305: RG22.1 241.94,36.83 241.3,37.47 241.3,65.09 240.03,66.36 240.03,90.17 234.47,95.73 209.39,95.73 205.74,99.38 193.52,99.38 189.23,103.66 176.85,103.66 173.82,106.69 IC1.95
PIN-SW01
  Top 0.305: RJ1.B7 85.09,23.11 78.1,30.09 78.1,56.52 76.84,57.78 68.58,57.78 67.31,59.05 67.31,63.18 66.78,63.72 SW01.2 65.72,64.14 | 66.04,64.14 65.72,64.14 | 65.72,64.14 63.18,66.67 63.18,87.95 71.44,96.2 81.44,96.2 90.49,105.25 127.48,105.25 141.45,119.22 155.1,119.22 159.57,114.75 IC1.12
PIN-SW02
  Top 0.305: 70.49,26.99 73.66,26.99 74.61,26.04 74.61,20.45 83.95,11.11 92.39,11.11 93.19,12.38 RJ1.A7 | 70.49,26.99 70.49,28.26 69.85,28.89 67.95,28.89 66.99,29.84 66.99,33.34 61.91,38.42 61.91,88.9 70.49,97.47 80.49,97.47 89.53,106.52 126.84,106.52 140.49,120.17 155.73,120.17 162.57,113.34 IC1.6 | 70.49,26.99 SW02.1
PIN-SW03
  Top 0.305: RJ1.D7 100.81,23.81 95.88,28.73 95.88,56.67 94.77,57.78 86.68,57.78 85.09,59.37 85.09,63.18 84.56,63.72 SW03.2 83.5,65.72 80.64,68.58 80.64,89.22 92.87,101.44 129.38,101.44 143.51,115.57 153.99,115.57 156.07,113.49 IC1.19
PIN-SW04
  Top 0.305: RJ1.C7 107.16,12.38 105.82,11.05 98.04,11.05 96.14,12.95 96.14,24.51 95.95,24.7 94.81,24.7 91.57,27.94 86.99,27.94 85.09,29.84 85.09,33.34 84.56,33.87 SW04.1 83.5,38.58 80.64,41.43 80.64,64.14 79.38,65.41 79.38,89.85 92.23,102.71 128.75,102.71 142.88,116.84 154.3,116.84 157.07,114.08 IC1.17
PIN-SW05
  Top 0.305: RJ1.F7 113.51,24.38 113.66,56.67 112.55,57.78 104.14,57.78 102.87,59.05 102.87,63.18 102.34,63.72 SW05.2 101.07,63.72 98.42,66.36 98.42,87.95 108.11,97.63 131.29,97.63 143.35,109.7 150.34,109.7 151.51,110.87 IC1.25
PIN-SW06
  Top 0.305: RJ1.E7 121.13,12.06 120.17,11.11 112.01,11.11 110.36,12.76 110.36,24.57 109.86,25.08 108.9,25.08 106.36,27.62 104.46,27.62 102.87,29.21 102.87,33.66 102.5,34.02 101.33,34.02 | SW06.1 101.33,34.02 | 101.33,34.02 101.28,33.97 101.28,38.42 98.42,41.27 98.42,64.45 97.16,65.72 97.16,89.22 106.84,98.9 130.65,98.9 144.78,113.03 153.35,113.03 154.07,112.31 IC1.23
PIN-SW07
  Top 0.305: RJ1.H7 131.29,25.65 131.44,56.67 130.33,57.78 122.55,57.78 120.65,59.69 120.65,63.18 120.12,63.72 SW07.2 118.53,63.72 116.2,66.04 116.2,88.27 121.6,93.66 142.56,93.66 143.83,94.93 143.83,98.58 147.93,102.69 IC1.39
PIN-SW08
  Top 0.305: RJ1.G7 135.1,12.06 134.14,11.11 125.79,11.11 124.33,12.57 124.33,24.89 120.65,28.57 120.65,33.34 120.12,33.87 SW08.1 118.59,34.35 118.59,40.48 116.2,42.86 116.2,64.14 114.94,65.41 114.94,89.22 120.65,94.93 141.92,94.93 142.56,95.57 142.56,98.9 147.34,103.69 IC1.37
PIN-SW09
  Top 0.305: RJ2.B7 149.22,26.29 149.22,56.36 147.8,57.78 140.33,57.78 138.43,59.69 138.43,63.18 137.9,63.72 SW09.2 136.16,63.87 133.99,66.04 133.99,88.11 135.73,89.85 144.46,89.85 147.64,93.03 147.64,97.63 149.69,99.69 IC1.45
PIN-SW10
  Top 0.305: RJ2.A7 152.4,12.06 151.45,11.11 143.38,11.11 141.35,13.14 141.35,13.91 138.75,16.51 138.75,28.89 138.43,29.21 138.43,33.34 137.9,33.87 SW10.1 136.84,40.48 133.99,43.34 133.99,64.14 132.72,65.41 132.72,88.74 135.1,91.12 143.83,91.12 146.37,93.66 146.37,97.95 149.11,100.69 IC1.43
PIN-SW11
  Top 0.305: RJ2.D7 160.02,26.6 160.66,27.3 162.56,29.21 164.47,29.21 167,31.75 167,56.67 165.89,57.78 158.11,57.78 156.21,59.69 156.21,63.18 155.68,63.72 SW11.2 153.94,63.87 151.77,66.04 151.77,89.69 152.08,90.01 153.19,90.01 154.57,91.39 IC1.54
PIN-SW12